# Altium PCB UHF - Transceiver.PcbDoc
Units mm, origin at the board's own origin, x right, y up, seen from the top; angles counter-clockwise.
Board outline 40.15 x 65.15 mm, 2 copper layers (Top Layer, Bottom Layer), stack 1.071 mm thick; 36 components, 27 nets, 114 pads, 285 vias.
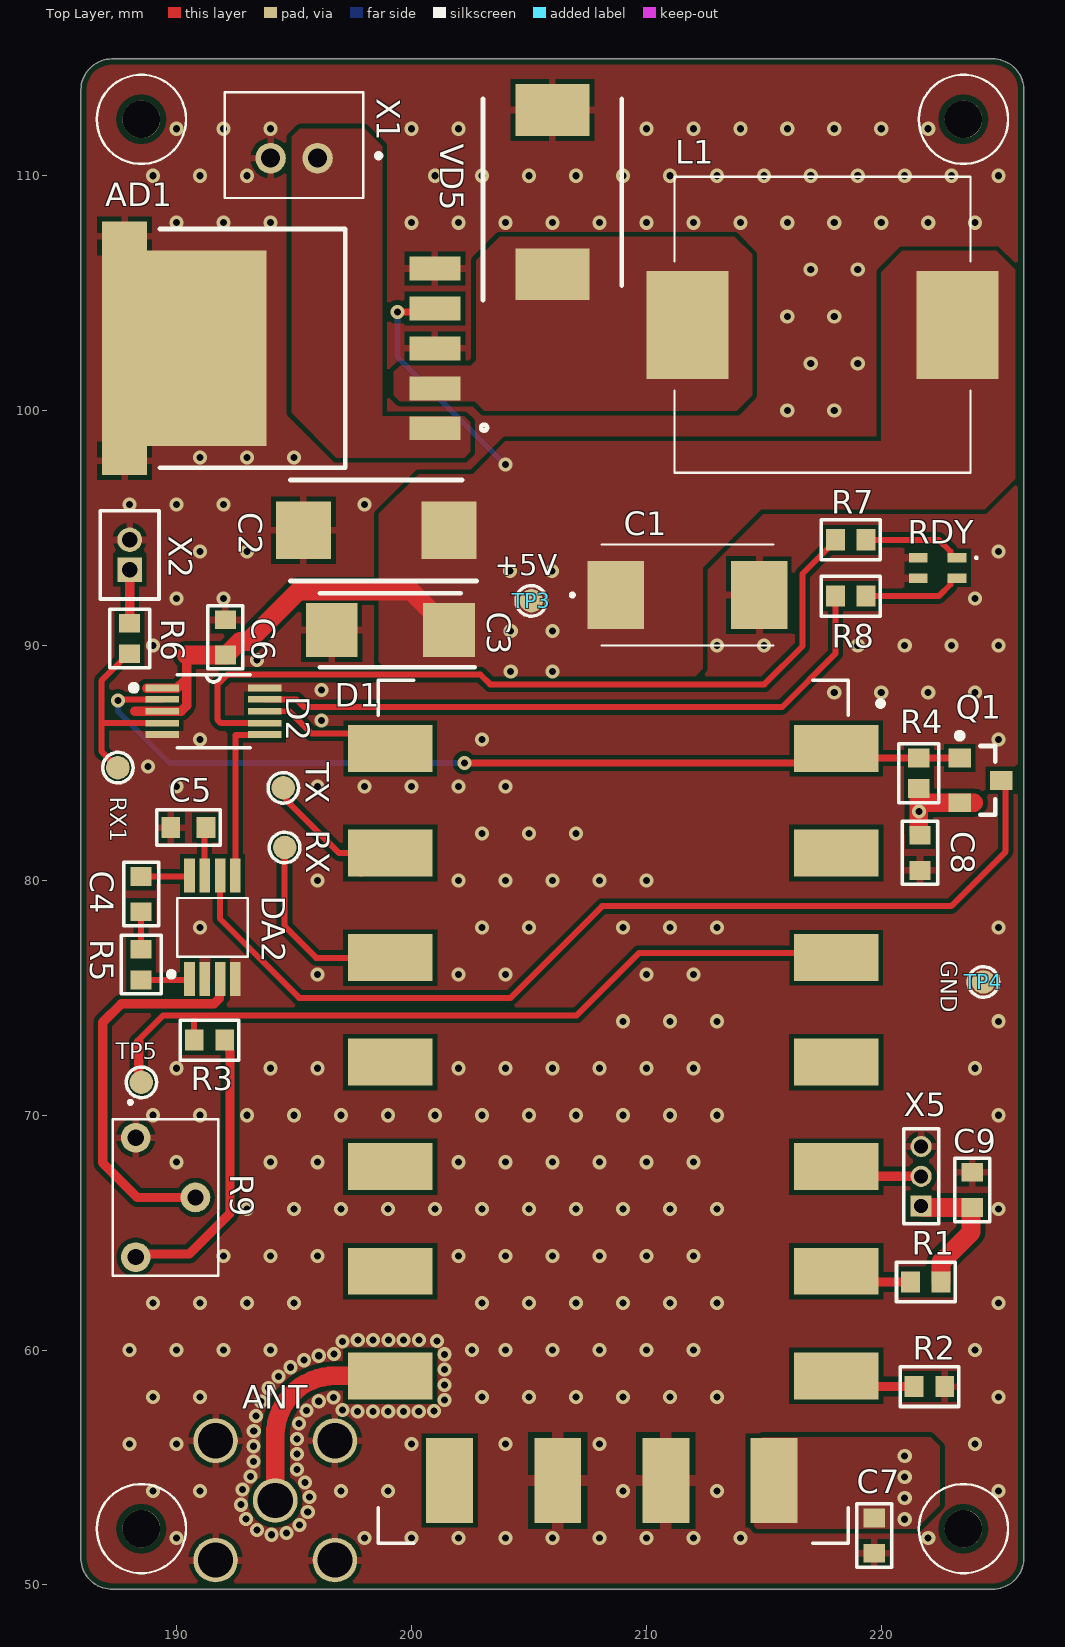
[diagram p0: Top Layer view]
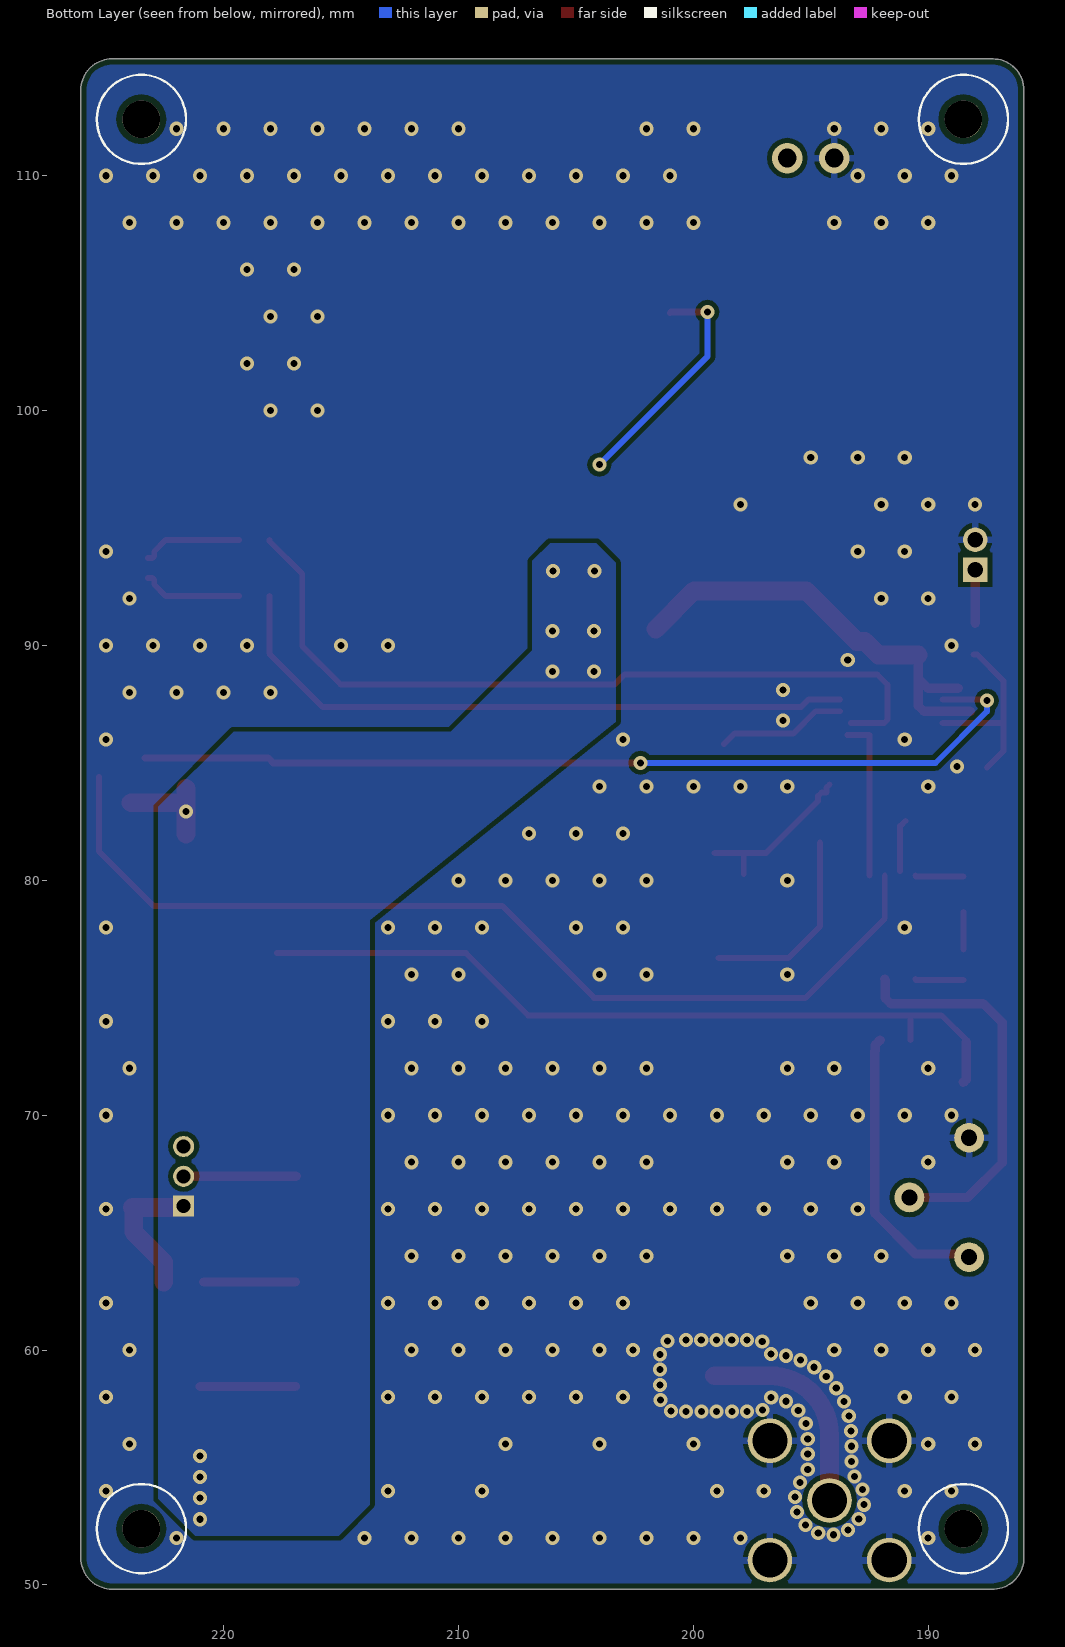
[diagram p1: Bottom Layer view, seen from below]

## Layer stack, top to bottom
Top Solder: solder mask 0.0102, Solder Resist, Dk 3.5
Top Layer: signal copper 0.0356
Dielectric 1: core 1, FR4 Tg135, Dk 4.5
Bottom Layer: signal copper 0.0356
Bottom Solder: solder mask 0.0102, Solder Resist, Dk 3.5

## Board outline
185.926,51.084 ccw(c187.25,51.15) 187.184,49.826 ccw(c187.2,49.9) 187.2,49.825 224.75,49.825 ccw(c224.75,51.15) 226.075,51.15 ccw(c226.057,51.15) 226.075,51.151 226.075,113.649 ccw(c226,113.65) 226.075,113.65 ccw(c224.75,113.65) 224.75,114.975 187.25,114.975 ccw(c187.25,114.955) 187.249,114.975 cw(c187.25,114.644) 187.25,114.975 187.249,114.975 ccw(c187.25,113.65) 185.925,113.651 ccw(c186.256,113.65) 185.925,113.65 cw(c186.059,113.65) 185.925,113.651 185.925,113.65 185.925,51.1 ccw(c186,51.1)

## Design rules (kind name [scope] priority, off if disabled: settings)
AcuteAngle [All] p1: minimum=3.50000000000000E+0001 checktracksonly=FALSE
BoardOutlineClearance "BoardOutlineClearance 1" [All] p1: gap=0.25 ignorepadtopadclearanceinfootprint=FALSE except(0: Arc-SplitContinuation Track-SplitContinuation SMDPad-SplitContinuation THPad-SplitContinuation Via-SplitContinuation Fill-SplitContinuation Poly-SplitContinuation Region-SplitContinuation Text-SplitContinuation; 0.01: Text-OutlineEdge Text-CavityEdge Text-CutoutEdge Text-SplitBarrior) // Milling
Clearance "Clearance-1 1/2 Oz" [All] p1: gap=0.125 ignorepadtopadclearanceinfootprint=FALSE except(0.05: Via-Via; 0.2: Arc-Fill Arc-Poly Track-Fill Track-Poly SMDPad-SMDPad SMDPad-Fill SMDPad-Poly THPad-Fill THPad-Poly Via-Fill Via-Poly Fill-Fill Fill-Poly Poly-Poly Poly-Region Poly-Text; 0.25: Arc-Hole Track-Hole SMDPad-Hole THPad-Hole Via-Hole Fill-Hole Poly-Hole Region-Hole Text-Hole) // Standart
DiffPairsRouting "DiffPairsRouting 1 Oz" [All] p1: maxlimit=0.254 minlimit=0.2 mostfreqgap=0.254 toplayer_minwidth=0.2 toplayer_maxwidth=0.381 toplayer_prefwidth=0.381 bottomlayer_minwidth=0.2 bottomlayer_maxwidth=0.381 bottomlayer_prefwidth=0.381 maxuncoupledlength=12.7
DiffPairsRouting "DiffPairsRouting 1/2 Oz" [All] p2: maxlimit=0.254 minlimit=0.1 mostfreqgap=0.254 toplayer_minwidth=0.1 toplayer_maxwidth=0.381 toplayer_prefwidth=0.381 bottomlayer_minwidth=0.1 bottomlayer_maxwidth=0.381 bottomlayer_prefwidth=0.381 maxuncoupledlength=12.7
HoleSize "Minimum HoleSize" [IsPad] p1: absolutevalues=TRUE maxlimit=5.9 minlimit=0.6 maxpercent=80.000 minpercent=20.000
HoleSize "Minimum HoleSize VIA 1" [IsVia] p2: absolutevalues=TRUE maxlimit=5.9 minlimit=0.3 maxpercent=80.000 minpercent=20.000 // Standart
HoleSize "Minimum HoleSize VIA 2" [IsVia] p3: absolutevalues=TRUE maxlimit=5.9 minlimit=0.2 maxpercent=80.000 minpercent=20.000 // Advance
HoleToHoleClearance Hole2HoleClearance [All] p1: gap=0.05 allowstackedmicrovias=FALSE
MinimumAnnularRing "Minimum AR VIA Standart" [IsVia] p1: minimumring=0.15
MinimumAnnularRing "Minimum AR PAD Standart" [IsPAD] p2: minimumring=0.15
MinimumSolderMaskSliver "SolderMask Bridge Advance" [All] p1: minsoldermaskwidth=0.1 // Mask LDI
MinimumSolderMaskSliver "SolderMask Bridge Standart" [All] p2: minsoldermaskwidth=0.15 // All Masks
PlaneClearance "PlaneClearance 3 Oz" [All] p1: clearance=0.35
PlaneClearance "PlaneClearance 2 Oz" [All] p2: clearance=0.3
PlaneClearance "PlaneClearance 1 Oz" [All] p3: clearance=0.2
PlaneClearance "PlaneClearance-1 1/2 Oz" [All] p4: clearance=0.2 // Standart
PlaneClearance "PlaneClearance-2 1/2 Oz" [All] p5: clearance=0.15 // Advance
PolygonConnect PolygonConnect_+5V [InNet('+5V')] p1: connectstyle=Direct reliefconductorwidth=0.254 reliefentries=4 polygonreliefangle="90 Angle" airgapwidth=0.254
PolygonConnect PolygonConnect_SA818S [HasFootprint('SA818S')] p2: thpad.connectstyle=Relief thpad.reliefconductorwidth=0.254 thpad.reliefentries=4 thpad.polygonreliefangle="90 Angle" thpad.airgapwidth=0.254 smdpad.connectstyle=Relief smdpad.reliefconductorwidth=0.5 smdpad.reliefentries=4 smdpad.polygonreliefangle="90 Angle" smdpad.airgapwidth=0.25 via.connectstyle=Relief via.reliefconductorwidth=0.254 via.reliefentries=4 via.polygonreliefangle="90 Angle" via.airgapwidth=0.254
PolygonConnect PolygonConnect_NetAD1_2 [InNet('NetAD1_2')] p3: connectstyle=Direct reliefconductorwidth=0.254 reliefentries=4 polygonreliefangle="90 Angle" airgapwidth=0.254
PolygonConnect PolygonConnect_NetAD1_1 [InNet('NetAD1_1')] p4: connectstyle=Direct reliefconductorwidth=0.254 reliefentries=4 polygonreliefangle="90 Angle" airgapwidth=0.254
PolygonConnect "PolygonConnect-1 1 Oz" [All] p5: thpad.connectstyle=Relief thpad.reliefconductorwidth=0.3 thpad.reliefentries=4 thpad.polygonreliefangle="90 Angle" thpad.airgapwidth=0.2 smdpad.connectstyle=Relief smdpad.reliefconductorwidth=0.3 smdpad.reliefentries=4 smdpad.polygonreliefangle="90 Angle" smdpad.airgapwidth=0.2 via.connectstyle=Direct via.reliefconductorwidth=0.254 via.reliefentries=4 via.polygonreliefangle="90 Angle" via.airgapwidth=0.254 // Standart
RoutingCorners [All] p1 off: cornerstyle=45-Degree minsetback=2.54 maxsetback=2.54
RoutingVias [All] p1: holewidth=0.3 width=0.6 viastyle="Through Hole" minholewidth=0.2 minwidth=0.4 maxholewidth=5.9 maxwidth=6.4
SilkToSilkClearance Silk2SilkClearance [All] p1 off: silktosilkclearance=0.15
SilkToSolderMaskClearance Silk2SolderMaskClearance [IsPad] p1 off: minsilkscreentomaskgap=0.15 clearancetoexposedcopper=TRUE
SolderMaskExpansion SolderMaskExpansion-1 [All] p1: expansion=0 istentingtop=FALSE // Standart
UnRoutedNet [All] p1: checkbadconnections=TRUE
Width "Width 1/2 Oz" [All] p1: maxlimit=10 minlimit=0.1 preferedwidth=0.125 checkconnectedcopper=TRUE
21 further rules are at their usual default settings.

## Classes and differential pairs
component class Transceiver: AD1 C1 C2 C3 C4 C5 C6 C7 C9 D1 D2 DA2 L1 Q1 R1 R2 R3 R4 R5 R6 R7 R8 R9 RX RX1 TP3 TP4 TP5 TX VD5 X1 X2 X5

## Components (designator, comment, footprint, x,y, rotation, side; value= is the part's Value field where it differs from the comment)
AD1 "LM2576HVR" KTT0005B 188.539,102.65 r0 top
ANT "SMA-JR" "HUBER-SUHNER_85 SMA-50-0-101/111 NE" 194.2,53.6 r270 top (schematic designator X3)
C1 "10TPB330M 10V 330uF  ±20%" POSCAP_D12_D15_D15E_D2E_D2_D3L_D4 211.75,92.15 r0 top value=330uF
C2 "6V 220 uF CASE D" CAPPM7343X310N 198.5,94.9 r180 top value=220uF
C3 "10V 100uF CASE C" CAPPM6032X280N 199.1,90.65 r180 top value=100uF
C4 "...nF" CAP_0603 188.49,79.413 r90 top
C5 "10nF" CAP_0603 190.5,82.25 r180 top
C6 "47uF" CAP_0603 192.075,90.35 r90 top
C7 "47uF" CAP_0603 219.7,52.1 r270 top
C8 "47uF" CAP_0603 221.65,81.175 r270 top
C9 "47uF" CAP_0603 223.875,66.825 r90 top
D1 "SA818S" SA818S 218.093,85.608 r180 top
D2 "RS2227XN" *SOP50P490X110-10N 191.575,87.2 r0 top
DA2 "LM386" LM386 190.55,75.8 r180 top
L1 "HPI1260-680" HPI1260101 217.5,103.65 r0 top
Q1 "IRLML6401" IRLML6401 224.225,84.258 r270 top (schematic designator VT1)
R1 "О" RES_0603 221.9,62.9 r180 top
R2 "О" RES_0603 222.05,58.45 r180 top
R3 "О" RES_0603 191.4,73.2 r180 top
R4 "1M" RES_0603 221.6,84.558 r270 top
R5 "...1%" RES_0603 188.49,76.413 r270 top
R6 "О" RES_0603 188,90.3 r90 top
R7 "..." RES_0603 218.7,94.5 r0 top
R8 "..." RES_0603 218.7,92.1 r0 top
R9 "3266W-1-103" 3266W1103 188.26,69.04 r270 top
RDY "KPTB-1612ESGC" KPTB1612ESGC 222.4,93.3 r0 top (schematic designator HL1)
RX "Тестовый контакт" TP1 194.6,81.4 r270 top (schematic designator TP1)
RX1 "Тестовый контакт" TP1 187.5,84.8 r90 top (schematic designator TP6)
TP3 "Тестовый контакт" TP1 205.1,91.9 r90 top
TP4 "Тестовый контакт" TP1 224.35,75.675 r90 top
TP5 "Тестовый контакт" TP1 188.5,71.4 r90 top
TX "Тестовый контакт" TP1 194.542,83.939 r270 top (schematic designator TP2)
VD5 "SS34" DIOM7959X262N 206,109.3 r90 top
X1 "B2B-PH-K-S (LF)(SN)" B2BPHKSLFSN 196,110.75 r0 top
X2 "Connector" PLL1.27-2 188,93.23 r270 top
X5 "Connector" 1,27-1X3_straight 221.7,66.13 r180 top

## Footprints (in the part's own frame and the unit in brackets; to place one, negate y for a bottom-side part, rotate by r counter-clockwise, add the part's x,y. Pads: shape width x height; smd on the part's side, far side on the other; paste and mask are expansions set on the pad)
1,27-1X3_straight [mm]
  rect 0.9x0.9 hole 0.6: 1(0,0)
  round 0.9 hole 0.6: 2(0,-1.27) 3(0,-2.54)
  silkscreen extent -0.75,-3.29 0.74,0.75
3266W1103 [mm]
  round 1.265 hole 0.69: 1(0,0) 2(2.54,2.54) 3(5.08,0)
  silkscreen extent -1.56,-0.98 5.87,3.52, body extent -0.79,-0.98 5.87,3.52, height 7.85
*SOP50P490X110-10N [mil]
  rect 56x11 smd mask+1.97: 1(-86,39) 2(-86,20) 3(-86,0) 4(-86,-20) 5(-86,-39) 6(86,-39) 7(86,-20) 8(86,0) 9(86,20) 10(86,39)
  silkscreen extent -139,-61 61,61, body extent -100,-59 98,59, height 41
B2BPHKSLFSN [mm]
  round 1.3 hole 0.8: 1(0,0) 2(-2,0)
  silkscreen extent -3.95,-1.7 2.7,2.8, body extent -3.95,-1.53 1.95,2.97, height 5.91
CAP_0603 [mm]
  rect 0.8x0.9 smd: 1(-0.75,0) 2(0.75,0)
  silkscreen extent -1.35,-0.75 1.35,0.75, body extent -0.8,-0.43 0.8,0.43, height 0.84
CAPPM6032X280N [mm]
  rect 2.2x2.3 smd: 1(-2.5,0) 2(2.5,0)
  silkscreen extent -3.6,-1.58 3,1.58, body extent -3,-1.58 3,1.58, height 2.8
CAPPM7343X310N [mm]
  rect 2.35x2.45 smd mask+0: 1(-3.1,0) 2(3.1,0)
  silkscreen extent -4.28,-2.15 3.65,2.15, body extent -3.65,-2.15 3.65,2.15, height 3.1
DIOM7959X262N [mm]
  rect 2.2x3.15 smd: A(3.5,0) K(-3.5,0)
  silkscreen extent -4.6,-2.95 3.97,2.95, body extent -3.97,-2.95 3.97,2.95, height 2.62
HPI1260101 [mm]
  rect 3.5x4.6 smd: 1(-5.75,0) 2(5.75,0)
  silkscreen extent -6.3,-6.3 6.3,6.3, body extent -7.15,-6.3 7.15,6.3, height 5.2
"HUBER-SUHNER_85 SMA-50-0-101/111 NE" [mm]
  round 1.9 hole 1.5 mask+0.05: 1(0,0) 2(2.54,2.54) 3(2.54,-2.54) 4(-2.54,-2.54) 5(-2.54,2.54)
  body extent -3.23,-3.23 11.73,3.23, height 9.73
IRLML6401 [mm]
  rect 0.802x0.972 smd: 1(-0.95,-0.885) 2(0.95,-0.885) 3(0,0.885)
  silkscreen extent -2.03,-1.01 1.46,0.64, body extent -1.46,-0.65 1.46,0.65, height 1.12
KPTB1612ESGC [mm]
  rect 0.8x0.4 smd: 1(0.825,0.43) 2(-0.825,0.43) 3(0.825,-0.43) 4(-0.825,-0.43)
  silkscreen extent 1.6,0.38 1.7,0.48, body extent -0.8,-0.63 0.8,0.63, height 0.95
KTT0005B [mm]
  rect 2.16x1.02 smd: 1(12.461,-3.4) 2(12.461,-1.7) 3(12.461,0) 4(12.461,1.7) 5(12.461,3.4)
  rect 6.99x8.33 smd: 6(1.786,0)
  rect 1.91x1.235 smd: 7(-0.754,4.782) 8(-0.754,-4.782)
  silkscreen extent 0.76,-5.08 14.68,5.08, body extent -1.11,-5.08 13.24,5.08, height 4.72
LM386 [mm] "Низковольтный аудиоусилитель для портативной аппаратуры, 4В…12В, 4мА, 325мВт, 8 Ом, [SO-8]"
  rect 0.45x1.45 smd mask+0.05: 1(0,0) 2(-0.65,0) 3(-1.3,0) 4(-1.95,0) 5(-1.95,-4.4) 6(-1.3,-4.4) 7(-0.65,-4.4) 8(0,-4.4)
  silkscreen extent -2.47,-3.45 0.87,-0.1, body extent -2.47,-4.65 0.52,0.25, height 0.88
PLL1.27-2 [mm] "connector 1.27-2"
  rect 1.05x1.05 hole 0.65 mask+0.05: 1(0,0)
  round 1.05 hole 0.65 mask+0.05: 2(-1.27,0)
  silkscreen extent -2.5,-1.25 1.25,1.25, body extent -2.52,-1.25 1.25,1.25, height 8.76
POSCAP_D12_D15_D15E_D2E_D2_D3L_D4 [mm]
  rect 2.4x2.9 smd: 1(-3.05,0) 2(3.05,0)
  silkscreen extent -4.95,-2.15 3.65,2.15, body extent 0,0 0,0, height 0.95
RES_0603 [mm]
  rect 0.8x0.9 smd: 1(-0.65,0) 2(0.65,0)
  silkscreen extent -1.25,-0.85 1.25,0.85, body extent -0.8,-0.4 0.8,0.4, height 0.45
SA818S [mm] "1W Embedded High Sensitivity Walkie Talkie Module"
  rect 3.6x2 smd mask+0.1: 1(0,0) 2(0,4.45) 3(0,8.9) 4(0,13.35) 5(0,17.8) 6(0,22.25) 7(0,26.7) 12(19,26.7) 13(19,22.25) 14(19,17.8) 15(19,13.35) 16(19,8.9) 17(19,4.45) 18(19,0)
  rect 2x3.6 smd mask+0.1: 8(2.665,31.159) 9(7.265,31.159) 10(11.865,31.159) 11(16.465,31.159)
  silkscreen extent -1.97,-2.92 19.5,33.83, body extent 0,-2.22 19,33.38, height 3.21
TP1 [mm]
  round 1 smd mask+0.05: 1(0,0)
  silkscreen extent -0.65,-0.65 0.65,0.65

## Part data
C1 C2 C3: library part "Конденсатор B41851F7228M000", Manufacturer=АЖЯР.67354.007ТУ, Power/Voltage="\"D\" - 16В", Tolerance=+-5%, Family=Конденсатор, Rem=К53-68
C4 C5 C6 C7 C8 C9: library part "CAP 0.1uF"
D2: library part Component_1
L1: library part "Дроссель ДПМ-2,4-20"
R1 R2 R3 R4 R6: library part R_1k
R5 R7 R8: library part "R_150K 1%"
R9: library part R_podstr, #Part number=RC0402JR-1010KL, #PlacementTolerance="\"\"", #Power=Мощность, #Tolerance=±5%, #Value="10 кОм", #(=(, #)=), #Type_1=0402, #Vendor="\"Yageo\"", TY=ТУ
RDY: library part BL-BEG204
X1: library part Connector

## Free pads (board coordinates)
  round 1.6 hole 1.6 unplated mask+0.05: 1(188.5,52.4) 1(188.5,112.4) 1(223.5,52.4) 1(223.5,112.4)

## Via types
v1: diameter 0.6, hole 0.3, Top Layer to Bottom Layer, tented both sides, 285 vias

## Nets (pads, with @x,y where several pads share a name; then routed paths per layer and width w, separated by ;. In a path a pad name is that pad's centre, name@x,y a point inside that pad or via, vN(x,y) a via of type N, cw(c..) or ccw(c..) an arc to the next point about the centre after c; other vN are vias at no path point)
+5V: AD1.4 C1.1 C2.1 C3.1 C6.1 C7.1 C8.1 C9.1 D1.8 D2.1 D2.3 L1.2 Q1.2 R1.1 R4.2 TP3.1 X5.1 | length 39.1
  Top Layer w0.254: AD1.4@200.95,104.2 AD1.4@201,104.15
  Top Layer w0.3: v1(199.4,104.2) AD1.4@200.95,104.2
  Top Layer w0.4: 188.216,87.2 D2.3 190.193,87.2 190.427,87.434 190.427,89.6 ; D2.1@188.727,88.186 189.391,88.186 190.017,88.186 190.3,88.469
  Top Layer w0.8: 190.427,89.6 192.125,89.6 192.7,90.175 193.045,90.175 195.195,92.325 199.975,92.325 C3.1@201.6,90.7 ; C8.1@221.6,81.975 v1(221.6,82.925) 221.6,83.308 R4.2 ; X5.1 221.755,66.075 C9.1@223.825,66.075 ; 221.817,83.308 223.94,83.308 ; R1.1 222.55,63.75 223.825,65.025 C9.1@223.825,66.075 ; C9.1 C9.1@223.825,66.075
  Bottom Layer w0.254: v1(199.4,104.2) 199.4,102.3 v1(204,97.7)
  other v1: 221,52.8 221,53.7 221,54.6 221,55.5 204.225,88.9 206,88.9 204.225,90.625 206,90.625 204.2,93.175 205.975,93.175
+5V_1: DA2.6 Q1.3 | length 42.4
  Top Layer w0.254: DA2.6 191.85,78.37 195.22,75 204.219,75 208.119,78.9 222.975,78.9 225.3,81.225 Q1.3@225.3,84.404
A1: DA2.3 R9.2 | length 16.6
  Top Layer w0.4: R9.2@190.662,66.5 188.325,66.5 186.85,67.975 186.85,73.95 187.65,74.75 191.591,74.75 191.825,74.984 191.825,75.775 DA2.3
AF: R3.1 R9.3 | length 12.6
  Top Layer w0.4: R9.3@187.895,64.092 190.542,64.092 192.275,65.825 192.275,72.716 192.25,72.741 192.25,73 R3.1
ANT: ANT.1 D1.12 | length 9.3
  Top Layer w0.8: ANT.1@194.2,53.4 194.2,56.368 cw(c196.74,56.368) 196.007,58.8 cw(c196.74,56.368) 196.74,58.908 D1.12
BP: C5.1 DA2.7 | length 2.2
  Top Layer w0.254: C5.1@190.97,82.53 191.193,82.307 191.193,80.411 DA2.7@191.2,80.404
EN_V1: D1.1 D2.2 Q1.1 R4.1 | length 39.2
  Top Layer w0.254: v1(187.5,87.65) 187.545,87.695 D2.2@189.391,87.695
  Top Layer w0.3: v1(202.25,85) 217.885,85 218.093,85.208 R4.1 Q1.1
  Bottom Layer w0.254: v1(187.5,87.65) 187.5,87.191 189.691,85 v1(202.25,85)
GND: AD1.3 AD1.5 AD1.6 AD1.7 AD1.8 ANT.2 ANT.3 ANT.4 ANT.5 C1.2 C2.2 C3.2 C5.2 C6.2 C7.2 C8.2 C9.2 D1.9 D1.10 D2.5 D2.10 DA2.2 DA2.4 R2.1 R9.1 RDY.2 RDY.4 TP4.1 VD5.A X1.2 X2.2 X5.3
  other v1: 190,52 198,52 200,52 202,52 204,52 206,52 208,52 210,52 212,52 214,52 222,52 194.036,52.139 194.682,52.209 193.421,52.349 195.233,52.554 192.957,52.805 195.584,53.101 192.741,53.418 195.663,53.746 189,54 191,54 197,54 199,54 209,54 213,54 225,54 192.802,54.065 195.458,54.363 193.14,54.62 195.128,54.923 193.272,55.256 195.128,55.573 193.272,55.906 188,56 190,56 200,56 204,56 208,56 224,56 195.128,56.223 193.284,56.556 195.212,56.867 193.381,57.199 197.709,57.388 198.359,57.388 199.009,57.388 199.659,57.388 200.309,57.388 200.959,57.401 195.534,57.432 197.062,57.449 193.594,57.813 196.053,57.823 201.406,57.873 189,58 191,58 196.684,57.978 203,58 205,58 207,58 209,58 211,58 213,58 225,58 193.915,58.378 201.413,58.523 194.341,58.869 201.413,59.173 194.853,59.27 195.43,59.57 196.051,59.761 201.413,59.823 196.697,59.835 188,60 190,60 192,60 194,60 202.575,60 204,60 206,60 208,60 210,60 212,60 224,60 197.066,60.37 201.092,60.388 197.714,60.428 198.364,60.428 199.014,60.428 199.664,60.428 200.314,60.428 189,62 191,62 193,62 195,62 203,62 205,62 207,62 209,62 211,62 213,62 225,62 192,64 194,64 196,64 202,64 204,64 206,64 208,64 210,64 212,64 193,66 195,66 197,66 199,66 201,66 203,66 205,66 207,66 209,66 211,66 213,66 225,66 190,68 194,68 196,68 202,68 204,68 206,68 208,68 210,68 212,68 189,70 191,70 193,70 195,70 197,70 199,70 201,70 203,70 205,70 207,70 209,70 211,70 213,70 225,70 190,72 194,72 196,72 202,72 204,72 206,72 208,72 210,72 212,72 224,72 209,74 211,74 213,74 225,74 196,76 202,76 204,76 210,76 212,76 191,78 203,78 205,78 209,78 211,78 213,78 225,78 196,80 202,80 204,80 206,80 208,80 210,80 203,82 205,82 207,82 190,84 196,84 198,84 200,84 202,84 204,84 188.775,84.85 191,86 203,86 225,86 196.175,86.8 218,88 220,88 222,88 224,88 196.175,88.1 193.426,89.389 189,90 213,90 215,90 219,90 221,90 223,90 225,90 190,92 192,92 224,92 191,94 193,94 225,94 188,96 190,96 192,96 198,96 191,98 193,98 195,98 216,100 218,100 217,102 219,102 216,104 218,104 217,106 219,106 190,108 192,108 194,108 200,108 202,108 204,108 206,108 208,108 210,108 212,108 214,108 216,108 218,108 220,108 222,108 224,108 189,110 191,110 193,110 201,110 203,110 205,110 207,110 209,110 211,110 213,110 215,110 217,110 219,110 221,110 223,110 225,110 190,112 192,112 194,112 200,112 202,112 210,112 212,112 214,112 216,112 218,112 220,112 222,112
IN: D1.18 D2.8 | length 5.5
  Top Layer w0.254: D2.8 194.8,87.2 195.752,86.248 198.252,86.248 D1.18@198.7,85.8
MIC: R6.2 X2.1 | length 2.3
  Top Layer w0.4: R6.2 X2.1
NetAD1_1: AD1.1 X1.1
NetAD1_2: AD1.2 L1.1 VD5.K
NetC4_1: C4.1 R5.1 | length 1.6
  Top Layer w0.254: R5.1 C4.1
NetC4_2: C4.2 DA2.8 | length 2.1
  Top Layer w0.254: C4.2 190.513,80.163 DA2.8
NetD1_3: D1.3 R3.2 TP5.1 | length 33.8
  Top Layer w0.254: 188.3,73.125 189.431,74.256 207.037,74.256 209.681,76.9 D1.3@217.736,76.9 ; R3.2 190.75,74.225
  Top Layer w0.4: 188.385,73.125 188.385,71.515 TP5.1
NetD1_6: D1.6 R1.2 | length 4
  Top Layer w0.254: D1.6@216.893,62.958 D1.6@216.951,62.9
  Top Layer w0.4: D1.6@216.951,62.9 R1.2@220.85,62.9
NetD1_7: D1.7 R2.2 | length 4.1
  Top Layer w0.254: D1.7@216.893,58.508 D1.7@216.951,58.45
  Top Layer w0.4: D1.7@216.951,58.45 R2.2@221,58.45
NetD1_16: D1.16 RX.1 | length 8.5
  Top Layer w0.254: RX.1@194.6,81.615 194.6,78.042 195.942,76.7 D1.16@198.927,76.7
NetD1_17: D1.17 TX.1 | length 7.2
  Top Layer w0.254: TX.1@194.197,84.082 194.339,83.94 194.339,83.736 194.543,83.736 194.685,83.594 194.685,83.391 196.917,81.158 D1.17@197.854,81.158 ; D1.17@197.854,80.273 D1.17@197.854,81.158 ; D1.17 D1.17@197.854,81.158
NetD2_4: D2.4 R6.1 RX1.1 | length 8.3
  Top Layer w0.254: RX1.1 186.797,85.503 186.797,86.705 ; R6.1@188.068,89.618 187.918,89.618 186.797,88.497 186.797,86.705 ; D2.4@189.391,86.705 186.797,86.705
NetD2_7: D2.7 R7.1 | length 34.1
  Top Layer w0.254: D2.7@193.283,86.692 191.882,86.692 191.733,86.841 191.733,88.333 192.157,88.757 202.938,88.757 203.348,88.348 215.023,88.348 216.65,89.975 216.65,93.05 218.05,94.45 R7.1
NetD2_9: D2.9 R8.1 | length 27.8
  Top Layer w0.254: D2.9 193.759,87.695 195.105,87.695 195.427,87.373 215.773,87.373 218.05,89.65 R8.1
NetDA2_1: DA2.1 R5.2 | length 2.1
  Top Layer w0.254: R5.2 190.513,75.763 DA2.1
NetHL1_1: R7.2 RDY.1 | length 4.3
  Top Layer w0.254: R7.2 222.455,94.5 222.952,94.003 222.952,93.803 223.025,93.73 RDY.1
NetHL1_3: R8.2 RDY.3 | length 4.3
  Top Layer w0.254: R8.2 222.455,92.1 222.952,92.597 222.952,92.797 223.025,92.87 RDY.3
Out: D2.6 DA2.5 | length 6.9
  Top Layer w0.254: DA2.5 192.5,86.197 D2.6@193.447,86.197
PTT: D1.5 X5.2 | length 4.8
  Top Layer w0.254: D1.5@216.893,67.408 D1.5@216.901,67.4
  Top Layer w0.4: D1.5@216.901,67.4 X5.2
pads on no net: D1.2 D1.4 D1.11 D1.13 D1.14 D1.15

## Polygon pours and split planes (outlines as drawn)
GND on Top Layer "GND_L01_P007" (solid, pour order 7): 224.816,49.9 187.25,49.9 cw(c187.268,51.163) 186.005,51.18 186.005,113.672 cw(c187.255,113.672) 187.255,114.922 224.818,114.9 cw(c224.748,113.636) 226.013,113.566 225.996,51.239 cw(c224.736,51.159)
+5V on Top Layer "NONET_L-01_P-001" (solid, pour order 1): 214.675,56.05 214.925,56.3 222.1,56.3 222.5,55.9 222.5,53.4 221.5,52.4 214.7,52.4 214.6,52.5
+5V on Top Layer "NONET_L-01_P-001" (solid, pour order 0): 220,105.9 220.9,106.8 224.9,106.8 225.7,106 225.7,97.1 224.4,95.8 214.9,95.8 212.4,93.3 212.4,89 212,88.6 199.3,88.6 198.6,89.3 198.6,95.6 200.3,97.3 202.6,97.3 204,98.7 220,98.7
NetAD1_2 on Top Layer "NONET_L-01_P-001" (solid, pour order 2): 199.25,101.65 199.513,101.913 202.513,101.913 202.75,102.15 202.75,106.4 203.75,107.4 213.75,107.4 214.5,106.65 214.5,100.65 213.85,100 203.1,100 202.7,100.4 199.5,100.4 199.25,100.65
NetAD1_1 on Top Layer "NONET_L-01_P-001" (solid, pour order 5): 195.25,112 194.9,111.65 194.9,99.9 196.8,98 202.25,98 202.5,98.25 202.5,99.5 202.25,99.75 198.75,99.75 198.75,111.25 198,112 197.75,112
GND on Bottom Layer "GND_L02_P006" (solid, pour order 6): 224.796,49.874 187.23,49.874 cw(c187.247,51.137) 185.984,51.154 185.984,113.646 cw(c187.234,113.646) 187.234,114.896 224.797,114.874 cw(c224.728,113.61) 225.992,113.54 225.976,51.213 cw(c224.716,51.133)
+5V on Bottom Layer "NONET_L-01_P-001" (solid, pour order 3): 203.3,93.525 204.125,94.35 206.1,94.35 206.85,93.6 206.85,89.8 210.325,86.325 219.575,86.325 222.775,83.125 222.775,53.675 221.2,52.1 215.1,52.1 213.775,53.425 213.775,78.301 203.3,86.76

## Silkscreen, mask and mechanical layers (free items; w line width, h text height)
Top Overlay:
  circle w0.1: c223.5,112.4 r1.9
  circle w0.1: c188.5,112.4 r1.9
  circle w0.1: c188.5,52.4 r1.9
  circle w0.1: c223.5,52.4 r1.9
  text "+5V" at 203.55,93 h0.9
  text "GND" at 222.533,76.576 h0.7 r270
Bottom Overlay:
  circle w0.1: c223.5,52.4 r1.9
  circle w0.1: c188.5,52.4 r1.9
  circle w0.1: c188.5,112.4 r1.9
  circle w0.1: c223.5,112.4 r1.9
Board:
  lines w0.15: 186,51.1 186,113.65 cw(c187.25,113.65) 187.25,114.9 224.75,114.9 cw(c224.75,113.65) 226,113.65 226,51.15 cw(c224.75,51.15) 224.75,49.9 187.2,49.9 ; 186,51.15 ccw(c187.25,51.15) 187.25,49.9